# Altium PCB DS18B20_Control_Industry.PcbDoc
Units mm, origin at the board's own origin, x right, y up, seen from the top; angles counter-clockwise.
Board outline 150 x 85 mm, 2 copper layers (Top Layer, Bottom Layer); 72 components, 54 nets, 236 pads, 102 vias.
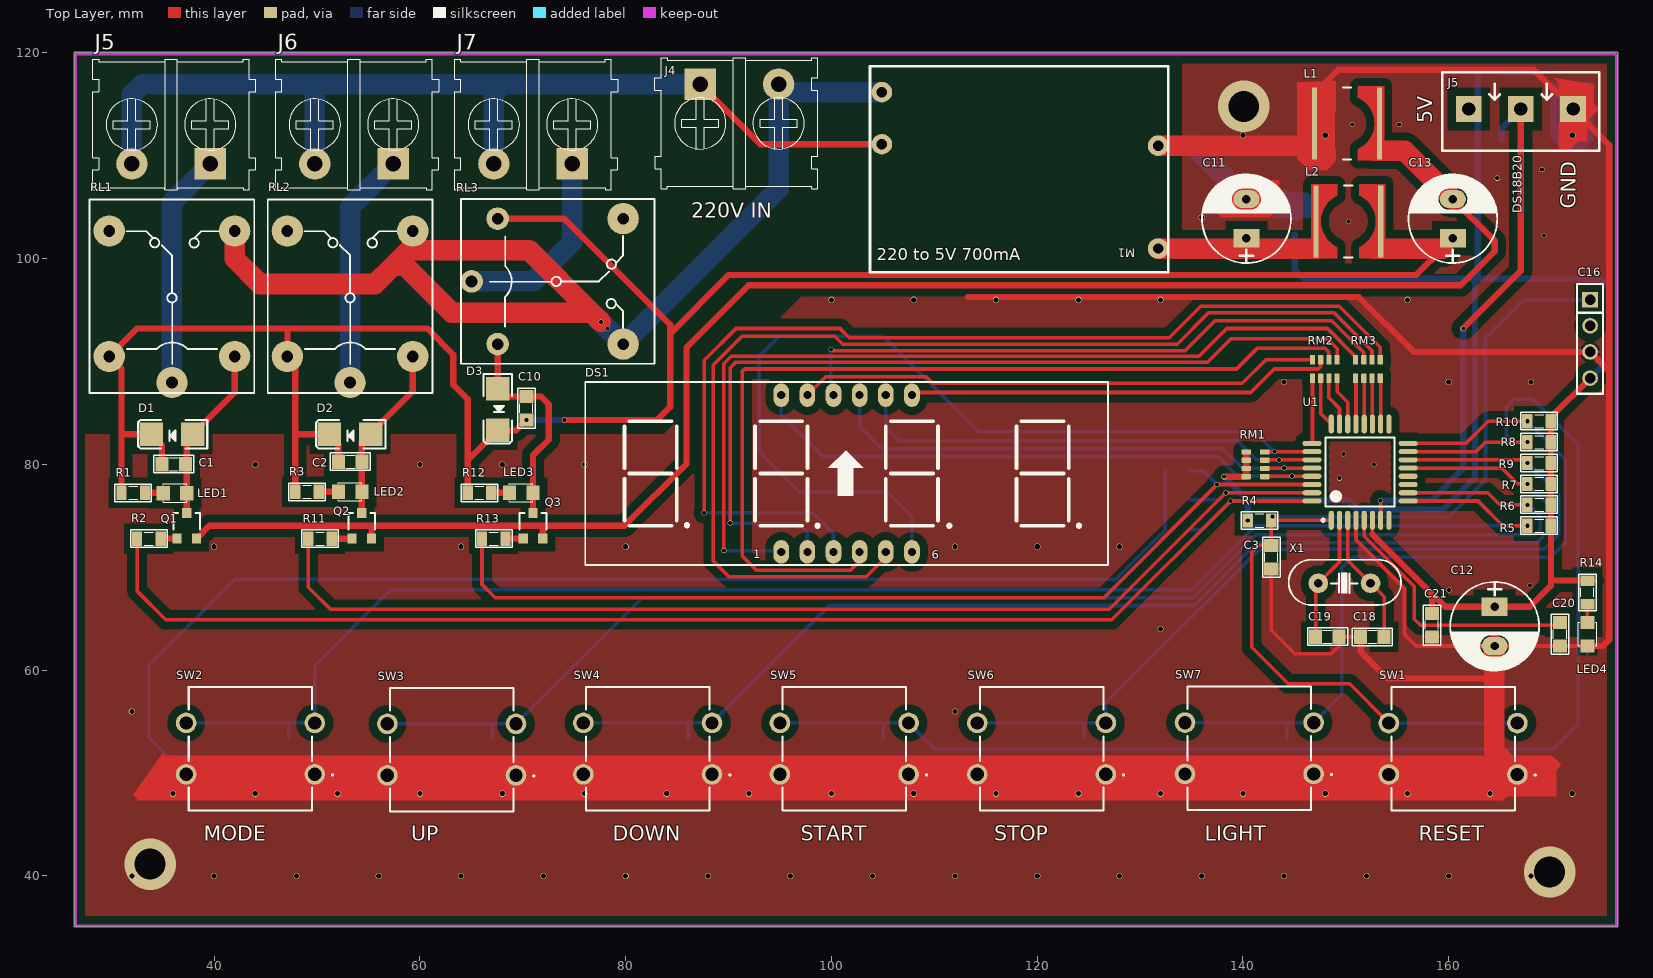
[diagram p0: Top Layer view]
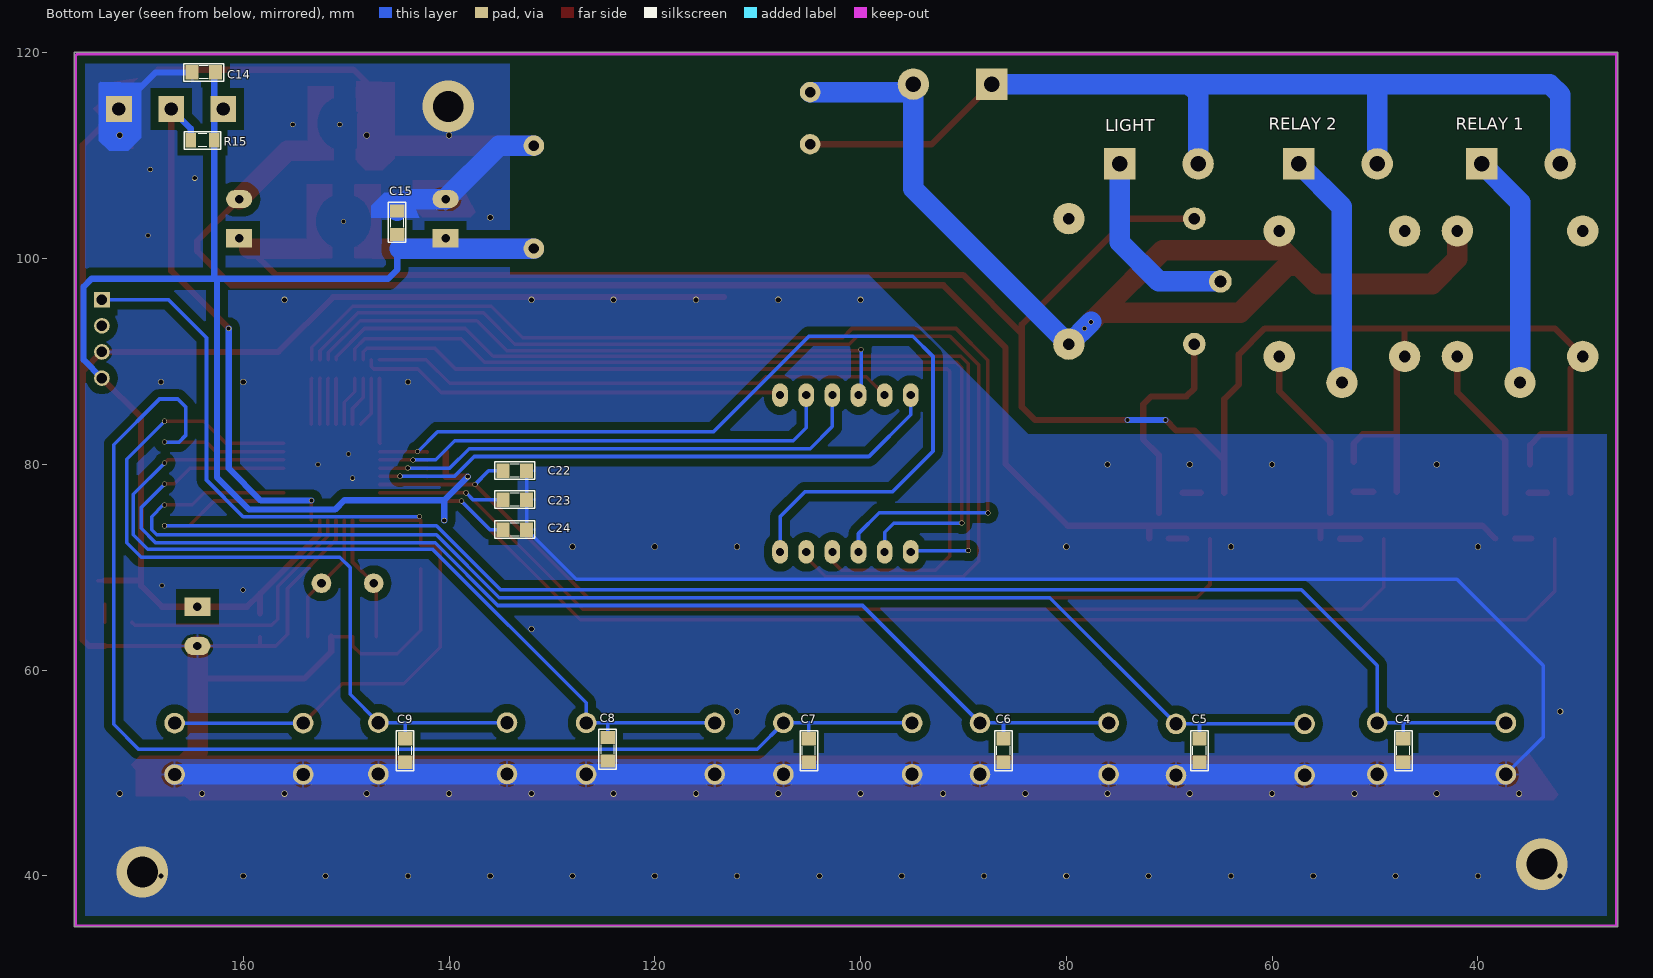
[diagram p1: Bottom Layer view, seen from below]

## Layer stack, top to bottom
Top Solder: solder mask 0.0102, Solder Resist, Dk 3.5
Top Layer: signal copper 0.0356
Dielectric 1: dielectric 0.32, FR-4, Dk 4.8
Bottom Layer: signal copper 0.0356
Bottom Solder: solder mask 0.0102, Solder Resist, Dk 3.5

## Board outline
26.416,35.052 176.416,35.052 176.416,120.052 26.416,120.052

## Design rules (kind name [scope] priority, off if disabled: settings)
Clearance [All] p1: gap=0.2 ignorepadtopadclearanceinfootprint=FALSE
PolygonConnect [All] p1: connectstyle=Relief reliefconductorwidth=0.254 reliefentries=4 polygonreliefangle="90 Angle" airgapwidth=0.254
RoutingVias [All] p1: holewidth=0.4 width=0.5 viastyle="Through Hole" minholewidth=0.4 minwidth=0.5 maxholewidth=0.4 maxwidth=0.5
SolderMaskExpansion [All] p1: expansion=0.102
Width [All] p1: maxlimit=2 minlimit=0.254 preferedwidth=0.6
30 further rules are at their usual default settings.

## Components (designator, comment, footprint, x,y, rotation, side; value= is the part's Value field where it differs from the comment)
C1 "104" SM-0805 36.068,80.01 r180 top value=103
C2 "104" SM-0805 53.213,80.264 r180 top value=103
C3 "104" SM-0805 142.748,70.993 r90 top value=103
C4 "104" SM-0805 47.244,52.197 r90 bottom value=103
C5 "104" SM-0805 67.056,52.197 r90 bottom value=103
C6 "104" SM-0805 86.106,52.197 r90 bottom value=103
C7 "104" SM-0805 105.029,52.197 r90 bottom value=103
C8 "104" SM-0805 124.587,52.324 r90 bottom value=103
C9 "104" SM-0805 144.272,52.197 r90 bottom value=103
C10 "104" SM-0805 70.358,85.471 r270 top value=103
C11 "1000uF/16V" CP1.5/3.4 140.335,101.981 r90 top
C12 "1000uF/16V" CP1.5/3.4 164.465,66.167 r270 top
C13 "1000uF/16V" CP1.5/3.4 160.401,101.981 r90 top
C14 "104" SM-0805 163.83,118.11 r180 bottom value=103
C15 "104" SM-0805 145.034,103.505 r270 bottom value=103
C16 "JP4" JP4-C1T 173.736,96.012 r270 top
C18 "22P" SM-0805 152.584,63.246 r0 top value=103
C19 "22P" SM-0805 148.209,63.246 r180 top value=103
C20 "104" SM-0805 170.815,63.5 r90 top value=103
C21 "104" SM-0805 158.369,64.389 r90 top value=103
C22 "104" SM-0805 133.604,79.375 r0 bottom value=103
C23 "104" SM-0805 133.604,76.581 r0 bottom value=103
C24 "104" SM-0805 133.604,73.66 r0 bottom value=103
D1 "Diode" DIO-SMD-106 35.901,82.931 r0 top
D2 "Diode" DIO-SMD-106 53.213,82.931 r0 top
D3 "Diode" DIO-SMD-106 67.564,85.344 r90 top
DS1 "7SEGQ" 7SEGQ 95.123,71.501 r0 top value="LED 7Q SEG"
J4 "KF2" KF2-7.62 91.059,113.157 r0 top
J5 "KF2" KF2-7.62 35.814,113.03 r180 top
J5 "KF3" KF3-5.08 172.085,114.554 r180 top
J6 "KF2" KF2-7.62 53.594,113.03 r180 top
J7 "KF2" KF2-7.62 70.993,113.03 r180 top
L1 "1.5uH" "BOURNS SRR6028" 150.114,113.157 r0 top
L2 "1.5uH" "BOURNS SRR6028" 150.241,103.632 r0 top
LED1 "LED" SM-LED-0805-Blue 35.052,77.216 r0 top
LED2 "LED" SM-LED-0805-Blue 52.07,77.343 r0 top
LED3 "LED" SM-LED-0805-Blue 68.707,77.248 r0 top
LED4 "LED" SM-LED-0805-Blue 173.482,64.643 r270 top
M1 "220-5VDC" "5V 700mA 3.5W AC DC" 103.752,98.685 r0 top
Q1 "2SC1815" SOT23-321 37.338,74.041 r0 top value=C1815
Q2 "2SC1815" SOT23-321 54.356,74.041 r0 top value=C1815
Q3 "2SC1815" SOT23-321 70.993,74.041 r0 top value=C1815
R1 "10k" RES-SMD-0805 32.131,77.248 r0 top
R2 "10k" RES-SMD-0805 33.655,72.791 r180 top
R3 "10k" RES-SMD-0805 49.022,77.343 r0 top
R4 "10k" RES-SMD-0805 141.605,74.549 r0 top
R5 "10k" RES-SMD-0805 168.783,74.041 r180 top
R6 "10k" RES-SMD-0805 168.783,76.073 r180 top
R7 "10k" RES-SMD-0805 168.783,78.105 r180 top
R8 "10k" RES-SMD-0805 168.783,82.169 r180 top
R9 "10k" RES-SMD-0805 168.783,80.137 r180 top
R10 "10k" RES-SMD-0805 168.783,84.201 r180 top
R11 "10k" RES-SMD-0805 50.292,72.771 r180 top
R12 "10k" RES-SMD-0805 65.786,77.248 r0 top
R13 "10k" RES-SMD-0805 67.183,72.771 r180 top
R14 "10k" RES-SMD-0805 173.482,67.564 r90 top
R15 "1k" RES-SMD-0805 163.957,111.506 r180 bottom
RL1 "Relay 10A/12V" RL_SPDT_10A#1 35.901,87.96 r90 top value="Relay SPDT, 10A, 12V"
RL2 "Relay 10A/12V" RL_SPDT_10A#1 53.213,87.96 r90 top value="Relay SPDT, 10A, 12V"
RL3 "Relay 10A/12V" RL_SPDT_10A#2 65.024,97.79 r0 top value="Relay SPDT, 10A, 12V"
RM1 "1k" RN4-0805 141.224,80.01 r180 top
RM2 "1k" RN4-0805 147.955,89.281 r90 top
RM3 "1k" RN4-0805 152.146,89.281 r90 top
SW1 "Tact Switch" SW4_12x12 166.778,58.587 r180 top value="Button chip 4 pin"
SW2 "Tact Switch" SW4_12x12 49.884,58.598 r180 top value="Button chip 4 pin"
SW3 "Tact Switch" SW4_12x12 69.442,58.507 r180 top value="Button chip 4 pin"
SW4 "Tact Switch" SW4_12x12 88.492,58.598 r180 top value="Button chip 4 pin"
SW5 "Tact Switch" SW4_12x12 107.596,58.598 r180 top value="Button chip 4 pin"
SW6 "Tact Switch" SW4_12x12 126.773,58.598 r180 top value="Button chip 4 pin"
SW7 "Tact Switch" SW4_12x12 146.966,58.634 r180 top value="Button chip 4 pin"
U1 "STM8S003K3T6C" LQFP32T30 151.384,79.248 r90 top
X1 "12Mhz" XT2 149.86,68.453 r0 top value=4Mhz

## Footprints (in the part's own frame and the unit in brackets; to place one, negate y for a bottom-side part, rotate by r counter-clockwise, add the part's x,y. Pads: shape width x height; smd on the part's side, far side on the other; paste and mask are expansions set on the pad)
"5V 700mA 3.5W AC DC" [mm]
  round 2 hole 1: 1(1.15,17.5) 2(1.15,12.44) 3(28,2.3) 4(28,12.3)
  silkscreen extent 0,0 29,20
7SEGQ [mil] "DIP 12 Leads; Body 48 x 20 mm; Pitch 0.5 mm"
  oval 60x90 hole 31: 1(0,0) 2(100,0) 3(200,0) 4(300,0) 5(400,0) 6(500,0) 7(500,600) 8(400,600) 9(300,600) 10(200,600) 11(100,600) 12(0,600)
  silkscreen extent -750,-50 1250,650, body extent -720,-80 1260,668, height 565
"BOURNS SRR6028" [mm] "Precision Wire Wound Inductor, 2-Leads, Body 6.80x6.80mm, IPC Medium Density"
  rect 0.5x7 smd: 1(-3.15,0) 2(3.15,0)
  Top Layer region: 3.6,3.6 1.1,3.6 1.1,2.5 1.4,2.4 1.7,2.1 1.9,2 2.1,1.7 2.3,1.4 2.5,1 2.6,0.7 2.7,0.3 2.7,0 3.6,0
  Top Layer region: 3.6,-3.6 1.1,-3.6 1.1,-2.5 1.4,-2.4 1.7,-2.1 1.9,-2 2.1,-1.7 2.3,-1.4 2.5,-1 2.6,-0.7 2.7,-0.3 2.7,0 3.6,0
  Top Layer region: -3.6,-3.6 -1.1,-3.6 -1.1,-2.5 -1.4,-2.4 -1.7,-2.1 -1.9,-2 -2.1,-1.7 -2.3,-1.4 -2.5,-1 -2.6,-0.7 -2.7,-0.3 -2.7,0 -3.6,0
  Top Layer region: -3.6,3.6 -1.1,3.6 -1.1,2.5 -1.4,2.4 -1.7,2.1 -1.9,2 -2.1,1.7 -2.3,1.4 -2.5,1 -2.6,0.7 -2.7,0.3 -2.7,0 -3.6,0
  Top Layer lines w0.1: -1.1,-3.55 -1.1,-2.5 ; -1.1,-2.5 cw(c0,0) -2.731,0 cw(c0,0) -1.1,2.5 ; -1.1,2.5 -1.1,3.55 ; 1.1,-3.55 1.1,-2.5 ; 1.1,-2.5 ccw(c0,0) 2.731,0 ccw(c0,0) 1.1,2.5 ; 1.1,2.5 1.1,3.55
  silkscreen extent -0.4,-3.5 0.4,3.5, body extent -3.4,-3.4 3.4,3.4, height 2.8
CP1.5/3.4 [mil] "Tu hoa 220->470uF,16V, 470uF/16V,25V"
  rect 70x100 hole 32: 1(0,0)
  oval 70x100 hole 32: 2(150,0)
  silkscreen extent -95,-170 245,170, body extent -85,-157 230,157, height 446
DIO-SMD-106 [mil]
  rect 90x90.55 smd: 1(80,0) 2(-80,0)
  silkscreen extent -130,-55 135,55, body extent -99,-50 106,52, height 95
JP4-C1T [mm] "4 row, straight, gold plating"
  rect 1.52x1.52 hole 1.02: 1(0,0)
  round 1.52 hole 1.02: 2(2.54,0) 3(5.08,0) 4(7.62,0)
  silkscreen extent -1.52,-1.27 9.14,1.27, body extent -1.52,-1.25 9.14,1.25, height 8.51
KF2-7.62 [mil]
  rect 120x120 hole 59.06 unplated: 1(-150,150)
  round 120 hole 59.06 unplated: 2(150,150)
  silkscreen extent -324,-250 300,250, body extent -301,-256 299,217, height 488
KF3-5.08 [mm]
  rect 2.5x2.5 hole 1.3: 1(0,0) 2(5.08,0) 3(10.147,0)
  silkscreen extent -2.54,-3.58 12.7,4.06, body extent -2.42,-3.51 12.58,3.99, height 10
LQFP32T30 [mm] "32 7 x 7mm 0.8mm (31.5mil)"
  oval 1.85x0.5 smd: 1(-4.675,2.8) 2(-4.675,2) 3(-4.675,1.2) 4(-4.675,0.4) 5(-4.675,-0.4) 6(-4.675,-1.2) 7(-4.675,-2) 8(-4.675,-2.8) 17(4.675,-2.8) 18(4.675,-2) 19(4.675,-1.2) 20(4.675,-0.4) 21(4.675,0.4) 22(4.675,1.2) 23(4.675,2) 24(4.675,2.8)
  oval 0.5x1.85 smd: 9(-2.8,-4.675) 10(-2,-4.675) 11(-1.2,-4.675) 12(-0.4,-4.675) 13(0.4,-4.675) 14(1.2,-4.675) 15(2,-4.675) 16(2.8,-4.675) 25(2.8,4.675) 26(2,4.675) 27(1.2,4.675) 28(0.4,4.675) 29(-0.4,4.675) 30(-1.2,4.675) 31(-2,4.675) 32(-2.8,4.675)
  silkscreen extent -4.8,-3.35 3.35,3.72, body extent -3.5,-3.5 3.5,3.5, height 1.6
RES-SMD-0805 [mil]
  rect 39.37x55 smd: 1(-45,0) 2(45,0)
  silkscreen extent -70,-34 70,33, body extent -39,-25 39,25, height 31
RL_SPDT_10A#1 [mil] "Relay SPDT, 5 pin, 10A,W 650mil, L 800mil, H 800mil"
  round 120 hole 45: 1(0,0) 2(580,240) 3(580,-240) 4(100,-240) 5(100,240)
  silkscreen extent -40,-315 700,315, body extent -46,-304 706,306, height 602
RL_SPDT_10A#2 [mil] "Relay SPDT, 5 pin, 10A,W 650mil, L 800mil, H 800mil"
  round 86.61 hole 45: 1(0,0) 4(100,-240) 5(100,240)
  round 120 hole 45: 2(580,240) 3(580,-240)
  silkscreen extent -40,-315 700,315, body extent -46,-304 706,306, height 602
RN4-0805 [mm]
  round 0.254 on Mech15: 0(0,0)
  rrect25% 0.95x0.5 smd: 1(-0.9,1.2) 2(-0.9,0.4) 3(-0.9,-0.4) 4(-0.9,-1.2) 5(0.9,-1.2) 6(0.9,-0.4) 7(0.9,0.4) 8(0.9,1.2)
  Top Layer pour cut-out: -0.4,1.7 0.4,1.7 0.4,-1.7 -0.4,-1.7
  body extent -0.87,-1.68 0.88,1.67, height 0.7
SM-0805 [mil] "Compoment SMD 80x50mil"
  rect 50x55 smd: 1(-45,0) 2(45,0)
  silkscreen extent -77,-34 76,33, body extent -40,-25 40,25, height 24
SM-LED-0805-Blue [mil]
  rect 50x55 smd: 1(0,0) 2(90,0)
  silkscreen extent 0,-35 90,35, body extent 5,-25 85,25, height 43
SOT23-321 [mm]
  rect 0.9x0.95 smd mask+0: 1(0.95,-1.25)
  rect 0.9x0.95 smd: 2(0,1.25) 3(-0.95,-1.25)
  silkscreen extent -1.3,-0.38 1.3,1.25, body extent -1.52,-1.23 1.48,1.27, height 1.06
SW4_12x12 [mm]
  round 2 hole 1.3: 1(0.1,8.723) 2(0.1,3.723) 3(12.6,3.723) 4(12.6,8.723)
  silkscreen extent -1.68,0.22 12.35,12.22, body extent -0.51,0.22 13.46,12.22, height 4.3
XT2 [mil] "Footpin for Crystal 2 pin"
  round 75 hole 34: 1(-100,0) 2(100,0)
  silkscreen extent -213,-83 217,90, body extent -216,-87 216,90, height 144

## Part data
C1 C2 C3 C4 C5 C6 C7 C8 C9 C10 C14 C15 C18 C19 C20 C21 C22 C23 C24: library part CM, "Cap SMD"
C11 C12 C13: library part CP4, "Cap 1000uF/16V - 220uF/50V", Description 1="2200uF-3300uF/6,3V - 1000uF-2200uF/10V", Description 2="1000uF/16V - 470uF => 1000uF/25V - 100uF/100V", Description 3=330uF>470uF/35V_220uF>470uF/50V_10uF>22uF/250V, Description 4="220uF => 330uF/63V - 10uF =>33uF/160 - 200V", Description 5="4,7uF>10uF/250V_3,3uF>10uF/400V - 2,2uF>4,7uF/450V"
C16: "WR-PHD 2.54 mm Angled Socket Header", Manufacturer="W¨¹rth Elektronik eiSos GmbH", partNo=613004143121, ComponentLink1 Description=Manufacturer, ComponentLink1URL=http://www.we-online.com, ComponentLink2 Description=Datasheet, ComponentLink2URL=http://katalog.we-online.de/em/datasheet/6130xx143121.pdf, Created by="Karrer Zheng", Created Date="29 March 2013", NoPins=04
DS1: library part LED7Q, "Four 7 Seg Dipslay"
J4 J5 J6 J7: Manufacturer="Würth Elektronik eiSos GmbH", partNo=691103110002, ComponentLink1 Description=Manufacturer, ComponentLink1URL=http://www.we-online.com, ComponentLink2 Description=Datasheet, ComponentLink2URL=http://katalog.we-online.de/em/datasheet/6911031100xx.pdf, Created by="Karrer Zheng", Created Date="29 October 2013", NoPins=2
J5: Manufacturer="Würth Elektronik eiSos GmbH", partNo=691103110003, ComponentLink1 Description=Manufacturer, ComponentLink1URL=http://www.we-online.com, ComponentLink2 Description=Datasheet, ComponentLink2URL=http://katalog.we-online.de/em/datasheet/6911031100xx.pdf, Created by="Karrer Zheng", Created Date="29 October 2013", NoPins=3
L1 L2: library part Inductor, "SMT Inductor"
M1: library part "5V 700mA 3.5W AC 220 to DC"
Q1 Q2 Q3: "NPN 600mW, ECB", =C2383
R1 R2 R3 R4 R5 R6 R7 R8 R9 R10 R11 R12 R13 R14 R15: library part R, "Resistor R1/4W"
RL1 RL2 RL3: library part "Relay 1", "Relay SPDT,10A - 12VDC 5 Pin", ="Relay SPDT, 10A, 24V"
RM1 RM2 RM3: library part ResPack
SW1 SW2 SW3 SW4 SW5 SW6 SW7: library part SW4
X1: library part XT2, "Crystal, 32.768 KHz, -40 to 85 degC, 3.2 x 1.5 x 0.9 mm SMD"

## Via types
v1: diameter 0.6, hole 0.5, Top Layer to Bottom Layer, tented both sides, 62 vias
v2: diameter 0.5, hole 0.4, Top Layer to Bottom Layer, tented both sides, 26 vias
v3: diameter 0.5, hole 0.4, Top Layer to Bottom Layer, 11 vias
v4: diameter 5, hole 3, Top Layer to Bottom Layer, 3 vias

## Nets (pads, with @x,y where several pads share a name; then routed paths per layer and width w, separated by ;. In a path a pad name is that pad's centre, name@x,y a point inside that pad or via, vN(x,y) a via of type N, cw(c..) or ccw(c..) an arc to the next point about the centre after c; other vN are vias at no path point)
220AC_L: J4.2 M1.1 RL1.3 RL2.3 RL3.3 | length 112.4
  Top Layer w2: RL1.3 41.997,99.989 44.45,97.536 55.626,97.536 57.404,99.314 ; RL2.3 RL2.3@59.309,101.219 ; v2(77.597,93.853) 76.708,94.742 ; 57.404,99.314 RL2.3@59.309,101.219 ; 57.404,99.314 58.547,99.314 63.119,94.742 76.708,94.742 ; RL2.3@59.309,101.219 59.69,100.838 70.612,100.838 76.708,94.742
  Bottom Layer w0.254: v2(77.597,93.853) v2(78.232,93.218)
  Bottom Layer w2: v2(77.597,93.853) RL3.3 94.869,106.807 J4.2 95.651,116.185 M1.1
220AC_N: J4.1 J5.2@32.004,109.22 J6.2 J7.2 M1.2 | length 98.5
  Top Layer w0.6: J4.1 93.091,111.125 M1.2
  Bottom Layer w2: J5.2@32.004,109.22 32.004,115.951 33.02,116.967 50.165,116.967 ; J6.2 49.784,116.586 50.165,116.967 ; J7.2 67.183,116.078 68.072,116.967 ; J4.1 68.072,116.967 ; 50.165,116.967 68.072,116.967
a: RM2.1 U1.25 | length 6.4
  Top Layer w0.35: U1.25 146.755,82.094 RM2.1
b: RM2.2 U1.24 | length 4.9
  Top Layer w0.35: RM2.2 147.555,84.952 U1.24
c: RM2.3 U1.23 | length 4.9
  Top Layer w0.35: RM2.3 148.355,86.468 149.384,85.439 U1.23
d: RM2.4 U1.22 | length 4.9
  Top Layer w0.35: RM2.4 149.155,87.065 150.184,86.036 U1.22
DOWN: C6.2 R7.2 SW4.2 SW4.3 U1.13 | length 120.9
  Top Layer w0.35: U1.13 165.151,79.648 166.694,78.105 v2(167.64,78.105)
  Bottom Layer w0.35: SW4.3 86.106,54.875 ; C6.2 86.106,54.875 ; v2(167.64,78.105) 169.926,75.819 169.926,73.787 168.529,72.39 141.351,72.39 135.255,66.294 99.811,66.294 SW4.2 86.106,54.875
DS18B20: J5.2@167.005,114.554 R15.1 U1.7 | length 52.4
  Top Layer w0.35: U1.7 v2(153.384,76.492)
  Top Layer w0.6: v2(161.417,93.218) 167.005,98.806 J5.2@167.005,114.554
  Bottom Layer w0.35: v2(153.384,76.492) v2@153.384,76.556
  Bottom Layer w0.6: v2(153.384,76.492) 158.28,76.492 161.417,79.629 v2(161.417,93.218) ; R15.1 165.1,112.649 J5.2@167.005,114.554
e: RM3.1 U1.21 | length 4.5
  Top Layer w0.35: RM3.1 150.984,88.343 U1.21
f: RM3.2 U1.20 | length 4.5
  Top Layer w0.35: RM3.2 151.784,88.343 U1.20
g: RM3.3 U1.19 | length 4.5
  Top Layer w0.35: RM3.3 152.584,88.343 U1.19
GND: C3.1 C4.1 C5.1 C6.1 C7.1 C8.1 C9.1 C11.2 C12.2 C14.1 C15.1 C16.3 C18.1 C19.1 C20.1 C21.1 C22.1 C23.1 C24.1 J5.1@172.085,114.554 L1.1 LED4.2 M1.4 SW1.1 SW1.4 SW2.1 SW2.4 SW3.1 SW3.4 SW4.1 SW4.4 SW5.1 SW5.4 SW6.1 SW6.4 SW7.1 SW7.4 U1.4 | length 516.7
  Top Layer w0.254: v3(160.02,67.779) v3@160.02,67.856 ; v3@169.164,102.264 v3(169.259,102.264)
  Top Layer w0.35: C3.1 142.748,63.881 145.034,61.595 148.59,61.595 149.352,62.357 C19.1 C18.1 ; U1.4 150.984,72.669 155.702,67.951 155.702,63.5 156.845,62.357 158.369,62.357 ; C21.1 158.369,62.357 ; C12.2@164.424,62.357 158.369,62.357 ; C12.2 C20.1 LED4.2
  Top Layer w0.6: 113.284,96.266 151.257,96.266 156.591,90.932 C16.3 175.595,89.073 ; 147.714,116.794 149.284,118.364 168.275,118.364 172.085,114.554 175.595,111.044 175.595,89.073 ; C18.1 151.441,61.792 154.051,59.182 164.424,59.182 ; LED4.2 175.006,62.357 175.595,62.946 175.595,89.073
  Top Layer w2: M1.4 L1.1@147.046,110.985 ; C12.2 164.424,62.357 164.424,59.182 164.424,52.118 SW1.1
  Bottom Layer w0.35: SW2.4 33.655,53.504 33.655,60.452 42.037,68.834 127.635,68.834 C24.1 C23.1 C22.1
  Bottom Layer w0.6: C14.1 168.529,118.11 J5.1@172.085,114.554
  Bottom Layer w2: SW2.4 SW2.1 SW4.4 SW5.4 166.667,49.875 SW1.1 ; M1.4 135.141,110.985 C11.2 143.891,105.791 C15.1
  other v1: 32,40 40,40 48,40 56,40 64,40 72,40 80,40 88,40 96,40 104,40 112,40 120,40 128,40 136,40 144,40 152,40 160,40 168,40 36,48 44,48 52,48 60,48 68,48 76,48 84,48 92,48 100,48 108,48 116,48 124,48 132,48 140,48 148,48 156,48 164,48 172,48 32,56 112,56 132,64 40,72 64,72 80,72 112,72 120,72 128,72 44,80 60,80 68,80 76,80 144,88 160,88 168,88 100,96 108,96 116,96 124,96 132,96 156,96 136,104 140,112 148,112 172,112
  other v3: 167.894,68.244 149.384,78.665 152.744,80 149.784,81.026 150.241,103.616 164.719,107.823 169.037,108.681 150.622,113.03 155.194,113.05
  other v4: 169.799,40.386 33.782,41.148 140.081,114.808
GND_RELAY: C13.2 L1.2 Q1.1 Q2.1 Q3.1 | length 163.4
  Top Layer w0.6: Q1.1 39.538,74.041 55.245,74.041 ; Q2.1 55.306,73.98 55.245,74.041 ; Q3.1 71.943,73.848 72.136,74.041 ; C13.2 164.465,101.727 164.465,100.711 161.163,97.409 91.948,97.409 85.915,91.376 85.915,80.073 79.883,74.041 72.136,74.041 ; 55.245,74.041 72.136,74.041
  Top Layer w2: 152.695,110.49 155.702,110.49 C13.2
h: RM3.4 U1.18 | length 4.5
  Top Layer w0.35: RM3.4 153.384,88.343 U1.18
LED1: DS1.12 RM1.1 U1.29 | length 58.6
  Top Layer w0.35: RM1.1 142.162,78.848 v2(144.78,78.848) U1.29
  Bottom Layer w0.35: DS1.12 95.123,84.836 99.187,80.772 137.541,80.772 139.465,78.848 v2(144.78,78.848)
LED2: DS1.9 RM1.2 U1.28 | length 50.6
  Top Layer w0.35: RM1.2 142.162,79.648 v2(144.018,79.648) U1.28
  Bottom Layer w0.35: DS1.9 102.743,83.693 104.902,81.534 138.049,81.534 139.935,79.648 v2(144.018,79.648)
LED3: DS1.8 RM1.3 U1.27 | length 47.3
  Top Layer w0.35: RM1.3 142.162,80.448 v2(143.51,80.448) U1.27
  Bottom Layer w0.35: DS1.8 105.283,83.566 106.553,82.296 139.446,82.296 141.294,80.448 v2(143.51,80.448)
LED4: DS1.6 RM1.4 U1.26 | length 90.3
  Top Layer w0.35: RM1.4 142.162,81.248 v2(143.051,81.248) U1.26
  Bottom Layer w0.35: DS1.6 107.823,74.93 105.41,77.343 96.901,77.343 92.964,81.28 92.964,90.5 94.92,92.456 105.016,92.456 114.287,83.185 141.114,83.185 v2(143.051,81.248)
LIGHT: C9.2 R10.2 SW7.2 SW7.3 U1.16 | length 78.8
  Top Layer w0.35: U1.16 161.677,82.048 163.83,84.201 v2(167.64,84.201)
  Bottom Layer w0.35: SW7.3 144.272,54.911 ; C9.2 144.272,54.911 ; v2(167.64,84.201) 171.323,80.518 171.323,72.39 169.926,70.993 150.622,70.993 149.606,69.977 149.606,57.651 SW7.2 144.272,54.911
MODE: C4.2 R5.2 SW2.2 SW2.3 U1.9 | length 155.7
  Top Layer w0.35: U1.9 162.844,76.448 165.251,74.041 v2(167.64,74.041)
  Bottom Layer w0.35: SW2.3 47.371,54.875 ; C4.2 47.244,54.748 47.371,54.875 ; v2(167.64,74.041) 141.224,74.041 135.001,67.818 57.15,67.818 49.784,60.452 SW2.2 47.371,54.875
NetC1_1: C1.1 D1.1 LED1.2 Q1.2 RL1.4 | length 17.1
  Top Layer w0.6: Q1.2 37.338,82.336 D1.1 41.997,86.995 RL1.4
NetC2_1: C2.1 D2.1 LED2.2 Q2.2 RL2.4 | length 17.3
  Top Layer w0.6: Q2.2 LED2.2 C2.1 54.356,82.169 59.309,87.122 RL2.4
NetC10_1: C10.1 D3.1 LED3.2 Q3.2 RL3.4 | length 21.1
  Top Layer w0.6: RL3.4 D3.1 68.326,86.614 C10.1 71.755,86.614 72.517,85.852 72.517,82.423 70.993,80.899 LED3.2 Q3.2
NetC18_2: C18.2 U1.3 X1.2 | length 12.8
  Top Layer w0.35: U1.3 150.184,70.669 X1.2 153.727,67.126 C18.2
NetC19_2: C19.2 U1.2 X1.1 | length 12.3
  Top Layer w0.35: C19.2 147.066,68.199 X1.1 149.384,70.517 U1.2
NetC20_2: C20.2 U1.5 | length 26.1
  Top Layer w0.35: U1.5 151.784,73.006 156.654,68.135 156.654,64.96 157.226,64.389 170.561,64.389 C20.2
NetDS1_1: DS1.1 RM3.8 | length 88.1
  Top Layer w0.35: v2(89.535,71.628) 89.535,89.789 90.255,90.509 135.721,90.509 138.43,93.218 148.209,93.218 150.946,90.481 RM3.8
  Bottom Layer w0.35: v2(89.535,71.628) 94.996,71.628 DS1.1
NetDS1_2: DS1.2 RM2.5 | length 86.5
  Top Layer w0.35: v2(90.17,74.295) 90.17,89.408 90.678,89.916 136.525,89.916 138.811,92.202 148.209,92.202 149.155,91.256 RM2.5
  Bottom Layer w0.35: v2(90.17,74.295) 96.774,74.295 97.663,73.406 DS1.2
NetDS1_3: DS1.3 RM3.5 | length 101.5
  Top Layer w0.35: v2(87.63,75.291) 87.63,90.119 90.729,93.218 100.838,93.218 101.727,92.329 132.842,92.329 135.89,95.377 149.352,95.377 153.346,91.383 RM3.5
  Bottom Layer w0.35: v2(87.63,75.291) 98.191,75.291 100.203,73.279 DS1.3
NetDS1_4: DS1.4 RM2.6 | length 90.1
  Top Layer w0.35: DS1.4 102.743,70.612 101.854,69.723 92.71,69.723 91.313,71.12 91.313,89.027 91.567,89.281 139.378,89.281 141.41,91.313 147.955,91.313 148.355,90.913 RM2.6
NetDS1_5: DS1.5 RM3.6 | length 106.9
  Top Layer w0.35: DS1.5 105.283,70.993 103.378,69.088 90.043,69.088 88.519,70.612 88.519,89.662 91.313,92.456 100.33,92.456 101.092,91.694 133.604,91.694 136.652,94.742 148.853,94.742 152.546,91.049 RM3.6
NetDS1_7: DS1.7 RM2.7 | length 42.1
  Top Layer w0.35: DS1.7 108.077,86.995 140.765,86.995 143.051,89.281 ; 143.637,89.281 143.051,89.281 ; RM2.7 147.555,89.516 147.32,89.281 143.051,89.281
NetDS1_10: DS1.10 RM3.7 | length 59.6
  Top Layer w0.35: v2(99.949,91.186) 100.076,91.059 134.366,91.059 137.287,93.98 148.639,93.98 151.746,90.873 RM3.7
  Bottom Layer w0.35: v2(99.949,91.186) 99.949,86.995 DS1.10
NetDS1_11: DS1.11 RM2.8 | length 51
  Top Layer w0.35: DS1.11 99.441,88.519 109.22,88.519 109.855,87.884 139.943,87.884 142.24,90.181 RM2.8
NetJ5_1: J5.1@39.624,109.22 RL1.1 | length 22.8
  Bottom Layer w2: RL1.1 35.901,105.497 J5.1@39.624,109.22
NetJ6_1: J6.1 RL2.1 | length 23
  Bottom Layer w2: RL2.1 53.213,105.029 J6.1
NetJ7_1: J7.1 RL3.1 | length 19
  Bottom Layer w2: RL3.1 70.993,97.79 74.803,101.6 J7.1
NetLED1_1: LED1.1 R1.2 | length 1.8
  Top Layer w0.6: R1.2 35.02,77.248 LED1.1
NetLED2_1: LED2.1 R3.2 | length 1.9
  Top Layer w0.6: R3.2 LED2.1
NetLED3_1: LED3.1 R12.2 | length 1.8
  Top Layer w0.6: R12.2 LED3.1
NetLED4_1: LED4.1 R14.1 | length 1.8
  Top Layer w0.35: LED4.1 R14.1
NetQ1_3: Q1.3 R2.1 | length 1.6
  Top Layer w0.6: R2.1 Q1.3
NetQ2_3: Q2.3 R11.1 | length 2
  Top Layer w0.6: R11.1 53.386,72.771 Q2.3
NetQ3_3: Q3.3 R13.1 | length 1.7
  Top Layer w0.6: R13.1 68.346,72.791 Q3.3
RELAY_LIGHT: C22.2 R13.2 U1.30 | length 93.5
  Top Layer w0.35: R13.2 66.04,68.326 67.31,67.056 126.492,67.056 v2(137.484,78.048) U1.30
  Bottom Layer w0.35: C22.2 136.157,79.375 v2(137.484,78.048)
RELAY_SSR_A: C24.2 R2.2 U1.32 | length 130.5
  Top Layer w0.35: R2.2 32.512,67.691 35.306,64.897 127.254,64.897 v2(138.805,76.448) U1.32
  Bottom Layer w0.35: C24.2 136.017,73.66 v2(138.805,76.448)
RELAY_SSR_B: C23.2 R11.2 U1.31 | length 111.7
  Top Layer w0.35: R11.2 49.149,68.072 51.308,65.913 127,65.913 v2(138.335,77.248) U1.31
  Bottom Layer w0.35: C23.2 137.668,76.581 v2(138.335,77.248)
RESET: C3.2 C16.1 R4.2 SW1.2 SW1.3 U1.1 | length 96.3
  Top Layer w0.35: U1.1 142.772,74.573 R4.2 C3.2 141.527,72.136 140.843,71.452 140.843,62.23 144.399,58.674 150.368,58.674 SW1.3
  Bottom Layer w0.35: v2(142.875,74.93) 160.02,74.93 163.576,78.486 163.576,92.329 167.259,96.012 C16.1 ; SW1.3 SW1.2
START: C7.2 R8.2 SW5.2 SW5.3 U1.15 | length 134.6
  Top Layer w0.35: U1.15 162.655,81.248 163.576,82.169 v2(167.64,82.169)
  Bottom Layer w0.35: SW5.3 105.156,54.875 ; C7.2 105.029,54.748 105.156,54.875 ; v2(167.64,82.169) 166.243,82.169 165.608,82.804 165.608,85.598 166.37,86.36 168.148,86.36 172.593,81.915 172.593,54.737 170.18,52.324 110.047,52.324 SW5.2 105.156,54.875
STOP: C8.2 R9.2 SW6.2 SW6.3 U1.14 | length 86.6
  Top Layer w0.35: U1.14 167.329,80.448 v2(167.64,80.137)
  Bottom Layer w0.35: SW6.3 124.587,54.875 ; C8.2 124.587,54.875 ; v2(167.64,80.137) 170.688,77.089 170.688,73.152 169.291,71.755 141.605,71.755 126.673,56.823 SW6.2 124.587,54.875
SWIM: C16.2
UP: C5.2 R6.2 SW3.2 SW3.3 U1.10 | length 136.5
  Top Layer w0.35: U1.10 163.798,77.248 164.973,76.073 v2(167.64,76.073)
  Bottom Layer w0.35: SW3.3 67.183,54.784 ; C5.2 67.056,54.657 67.183,54.784 ; v2(167.64,76.073) 167.767,76.073 168.91,74.93 168.91,73.66 168.402,73.152 141.224,73.152 135.128,67.056 81.614,67.056 SW3.2 67.183,54.784
VCC: C11.1 C12.1 C14.2 C15.2 C16.4 C21.2 J5.3 L2.1 M1.3 R4.1 R5.1 R6.1 R7.1 R8.1 R9.1 R10.1 R14.2 R15.2 RM1.5 RM1.6 RM1.7 RM1.8 U1.6 | length 196.3
  Top Layer w0.35: 152.584,73.222 U1.6 ; C12.1 C12.1@164.846,66.167 ; R14.2 R14.2@174.117,68.707
  Top Layer w0.6: v2(138.176,78.81) RM1.8 RM1.7 RM1.6 RM1.5 ; 152.584,73.222 158.369,67.437 ; C21.2 158.369,67.437 ; C12.1 159.639,66.167 158.369,67.437 ; C12.1@164.846,66.167 167.894,66.167 169.926,68.199 169.926,68.58 ; R14.2 170.053,68.707 169.926,68.58 ; C16.4 169.926,84.582 R7.1 R6.1 R5.1 169.926,68.58
  Top Layer w2: M1.3 L2.1@147.317,100.985
  Bottom Layer w0.6: v2(138.176,78.81) 140.462,76.524 ; v2(140.462,74.549) 140.462,76.524 ; C15.2 145.034,98.933 145.923,98.044 162.433,98.044 ; C14.2 162.814,117.983 R15.2 162.814,98.171 162.941,98.044 ; C16.4 175.514,90.17 175.514,97.282 174.752,98.044 162.941,98.044 ; 140.462,76.524 150.171,76.524 151.084,75.611 159.431,75.611 162.56,78.74 162.56,97.917 162.433,98.044 ; 162.433,98.044 162.941,98.044
  Bottom Layer w2: M1.3 144.8,100.985
VCC_RELAY: C1.2 C2.2 C10.2 C13.1 D1.2 D2.2 D3.2 L2.2 R1.1 R3.1 R12.1 RL1.5 RL2.5 RL3.5 | length 229.7
  Top Layer w0.6: R1.1 30.988,83.058 ; C1.2 34.925,81.875 D1.2 31.115,82.931 30.988,83.058 ; R3.1 47.879,82.804 ; C2.2 52.07,82.042 D2.2 48.006,82.931 47.879,82.804 ; R12.1 64.643,80.391 ; RL3.5 74.041,103.886 84.328,93.599 84.328,92.71 ; v2(70.358,84.328) 69.342,83.312 D3.2 64.643,80.391 ; v2(74.041,84.328) 83.058,84.328 84.328,85.598 84.328,92.71 ; C13.1 159.405,100.985 156.845,98.425 90.043,98.425 84.328,92.71 ; 30.988,83.058 30.988,89.317 RL1.5 32.523,93.218 47.117,93.218 ; 47.117,93.218 60.706,93.218 63.246,90.678 63.246,87.757 64.643,86.36 64.643,80.391 ; 47.117,93.218 RL2.5 47.879,89.738 47.879,82.804
  Top Layer w2: 152.738,100.985 159.405,100.985
  Bottom Layer w0.6: v2(70.358,84.328) v2(74.041,84.328)
pads on no net: RL1.2 RL2.2 RL3.2 RM1.0 RM2.0 RM3.0 U1.8 U1.11 U1.12 U1.17

## Polygon pours and split planes (outlines as drawn)
GND on Top Layer (solid, pour order 6): 26.543,35.179 26.543,82.931 83.693,82.931 99.187,98.425 134.239,98.425 134.112,98.552 134.112,119.888 176.149,119.888 176.276,119.761 176.276,35.179
GND on Top Layer "Top Layer-GND 1" (solid, pour order 0): 10.541,113.538 10.668,113.665 10.922,113.665
GND on Bottom Layer (solid, pour order 8): 26.543,35.179 26.543,82.931 83.693,82.931 99.187,98.425 134.112,98.425 134.112,119.888 176.149,119.888 176.276,119.761 176.276,35.179

## Keep-outs
Keep-Out Layer:
  lines w0.254: 26.543,35.179 176.276,35.179 176.276,119.761 176.149,119.888 26.543,119.888 26.543,35.179

## Other copper
Top Layer:
  region net GND: 145.288,117.136 145.288,109.728 146.431,108.585 148.145,108.585 148.913,109.354 148.913,114.101 148.841,114.173 149.014,114.346 149.014,117.313
  region net GND: 170.18,117.602 170.688,117.094 170.688,110.707 171.781,110.707 171.831,110.657 172.573,111.399 173.482,111.399 173.482,113.414 174.622,114.554 174.117,115.059 174.117,116.967
  region net GND: 137.391,104.521 137.895,104.017 142.59,104.017 143.51,104.937 143.51,107.611 139.065,107.611
  region net GND: 35.02,51.943 35.274,51.689 170.058,51.689 170.942,50.805 170.434,50.297 170.434,47.752 165.682,47.752 165.174,47.244 165.047,47.371 32.639,47.371 32.131,47.879
Bottom Layer:
  region net GND: 142.875,104 147.574,104 147.574,105.156 146.304,106.426 144.089,106.426 143.962,106.553
  region net GND: 169.926,117.094 169.926,111.76 171.196,110.49 173.049,110.49 174.042,111.483 174.042,117.042 173.863,117.221

## Silkscreen, mask and mechanical layers (free items; w line width, h text height)
Top Overlay:
  text "5V" at 158.877,113.157 h2.5 r90
  text "GND" at 172.847,104.832 h2.5 r90
  text "DS18B20" at 167.386,104.394 h1.52 r90
  text "220V IN" at 86.36,103.505 h2.5
  text "MODE" at 38.989,42.926 h2.5
  text "UP" at 59.182,42.926 h2.5
  text "DOWN" at 78.74,42.926 h2.5
  text "START" at 97.028,42.926 h2.5
  text "STOP" at 115.824,42.926 h2.5
  text "LIGHT" at 136.271,42.926 h2.5
  text "RESET" at 157.099,42.926 h2.5
Bottom Overlay:
  text "RELAY 1" at 42.164,112.141 h2
  text "RELAY 2" at 60.325,112.141 h2
  text "LIGHT" at 76.2,112.014 h2
Bottom Solder:
  lines w1.8: 32.004,109.22 32.004,115.951 33.02,116.967 87.249,116.967 ; 35.901,87.96 35.901,105.537 39.584,109.22 39.624,109.22 ; 49.784,109.22 49.784,116.967 ; 53.086,87.757 53.086,104.902 57.531,109.347 57.785,109.347 ; 65.024,97.79 70.993,97.79 74.803,101.6 74.803,109.22 ; 67.183,109.22 67.183,116.967 ; 77.597,93.853 79.756,91.694 94.869,106.807 94.869,116.967

## Text inside footprints (layer, text, board x,y; h text height)
DS1: Top Overlay "6" at 109.728,70.841 h0.8; Top Overlay "1" at 92.38,70.891 h0.8
M1: Top Overlay "220 to 5V 700mA" at 104.387,99.447 h2